# Altium PCB PCB3.PcbDoc
Units mm, origin at the board's own origin, x right, y up, seen from the top; angles counter-clockwise.
Board outline 54 x 25 mm, 2 copper layers (Top Layer, Bottom Layer); 7 components, 28 nets, 102 pads, 36 vias.
Unrouted connection lines stored in the file: 1.
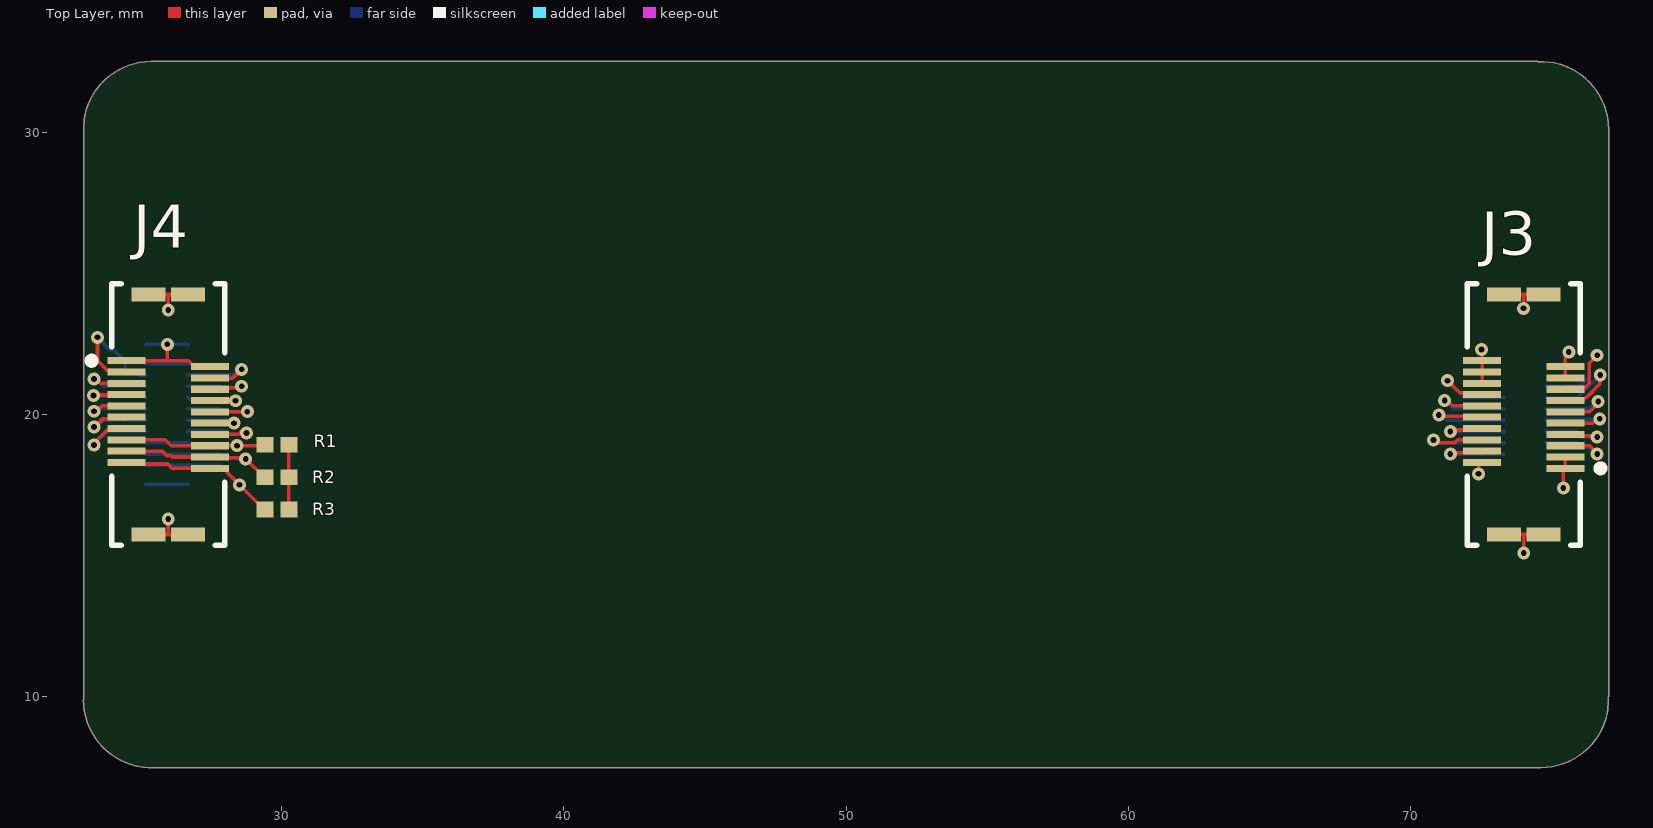
[diagram p0: Top Layer view]
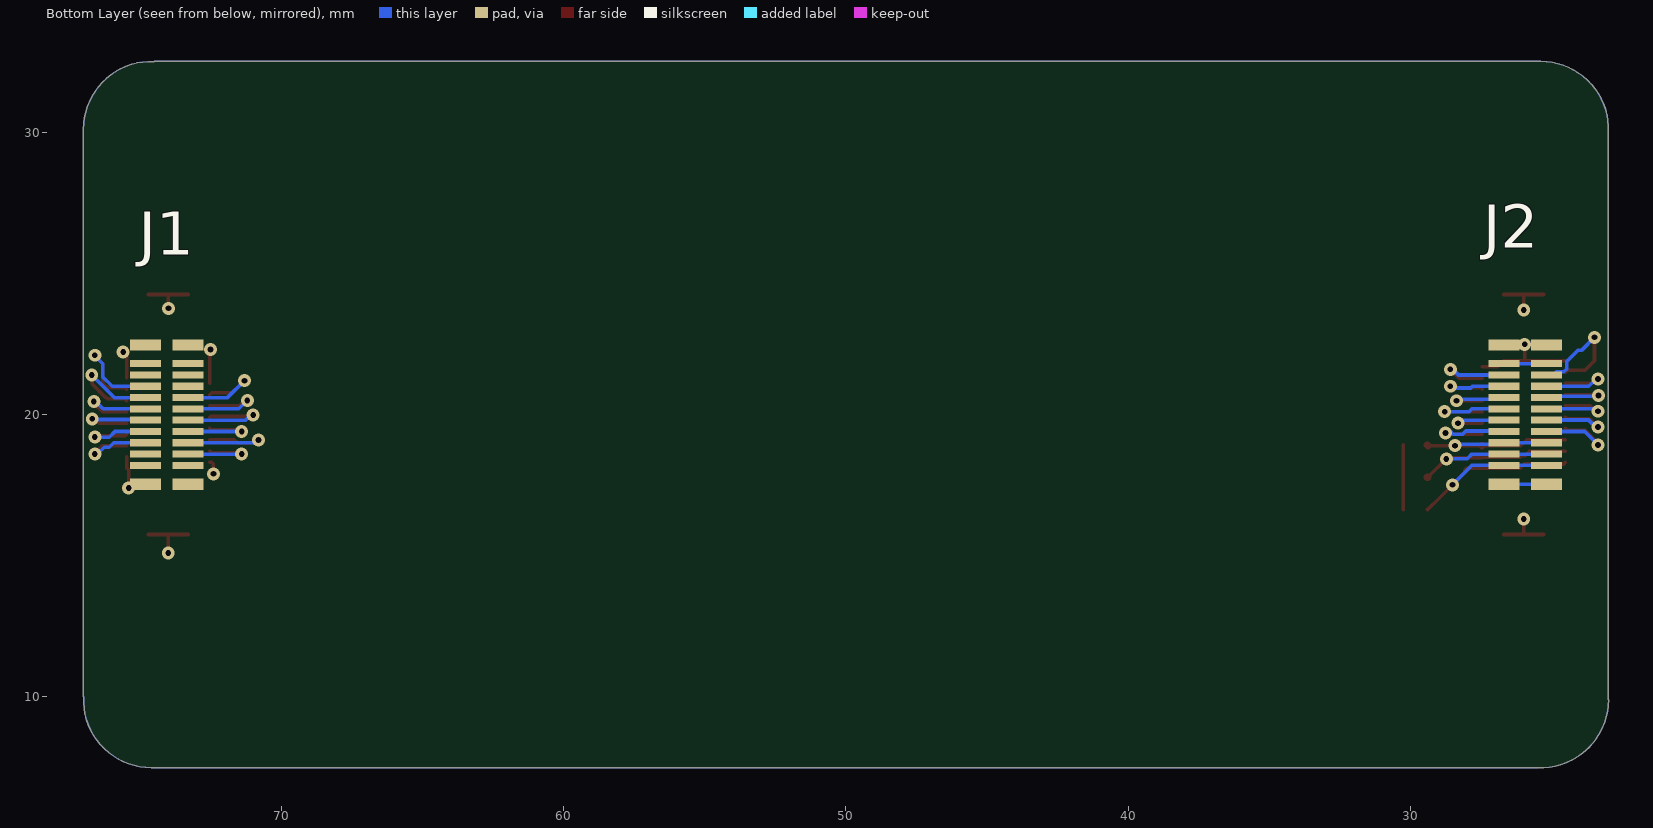
[diagram p1: Bottom Layer view, seen from below]

## Layer stack, top to bottom
Top Solder: solder mask 0.0102, Solder Resist, Dk 3.5
Top Layer: signal copper 0.0356
Dielectric 1: dielectric 0.32, FR-4, Dk 4.8
Bottom Layer: signal copper 0.0356
Bottom Solder: solder mask 0.0102, Solder Resist, Dk 3.5

## Board outline
23,9.902 23,30 cw(c25.4,30.1) 25.4,32.502 74.498,32.502 74.5,32.5 cw(c74.6,30.1) 77.002,30.1 77.002,10.002 77,10 cw(c74.6,9.9) 74.6,7.498 25.502,7.498 25.5,7.5 cw(c25.4,9.9)

## Design rules (kind name [scope] priority, off if disabled: settings)
Clearance [All] p1: gap=0.102 ignorepadtopadclearanceinfootprint=FALSE
PolygonConnect [All] p1: connectstyle=Relief reliefconductorwidth=0.254 reliefentries=4 polygonreliefangle="90 Angle" airgapwidth=0.254
RoutingVias [All] p1: holewidth=0.203 width=0.457 viastyle="Through Hole" minholewidth=0.203 minwidth=0.457 maxholewidth=0.711 maxwidth=1.27
SolderMaskExpansion [All] p1: expansion=0.102 istentingtop=FALSE
Width [All] p1: maxlimit=1.27 minlimit=0.102 preferedwidth=0.127
30 further rules are at their usual default settings.

## Components (designator, comment, footprint, x,y, rotation, side; value= is the part's Value field where it differs from the comment)
J1 "2039550203" 2039550203 74,20 r90 bottom
J2 "2039550203" 2039550203 26,20 r270 bottom
J3 "2039560203" Molex_0_MFG 74,20 r90 top
J4 "2039560203" Molex_0_MFG 26,20 r270 top
R1 "0R" RESC1005X40X25NL05T10 29.845,18.923 r0 top
R2 "0R" RESC1005X40X25NL05T10 29.845,17.78 r0 top
R3 "0R" RESC1005X40X25NL05T10 29.845,16.637 r0 top

## Footprints (in the part's own frame and the unit in brackets; to place one, negate y for a bottom-side part, rotate by r counter-clockwise, add the part's x,y. Pads: shape width x height; smd on the part's side, far side on the other; paste and mask are expansions set on the pad)
2039550203 [mm]
  rect 0.25x1.1 smd mask+0.102: 1(-1.8,0.8) 2(-1.8,-0.7) 3(-1.4,0.8) 4(-1.4,-0.7) 5(-1,0.8) 6(-1,-0.7) 7(-0.6,0.8) 8(-0.6,-0.7) 9(-0.2,0.8) 10(-0.2,-0.7) 11(0.2,0.8) 12(0.2,-0.7) 13(0.6,0.8) 14(0.6,-0.7) 15(1,0.8) 16(1,-0.7) 17(1.4,0.8) 18(1.4,-0.7) 19(1.8,0.8) 20(1.8,-0.7)
  rect 0.4x1.1 smd mask+0.102: 21(-2.465,0.8) 22(-2.465,-0.7) 23(2.465,0.8) 24(2.465,-0.7)
  body extent -2.68,-1 2.68,1, height 2.9
Molex_0_MFG [mm]
  rect 0.25x1.35 smd paste+0 mask+0: 1(-1.905,-1.475) 2(-1.695,1.475) 3(-1.505,-1.475) 4(-1.295,1.475) 5(-1.105,-1.475) 6(-0.895,1.475) 7(-0.705,-1.475) 8(-0.495,1.475) 9(-0.305,-1.475) 10(-0.095,1.475) 11(0.095,-1.475) 12(0.305,1.475) 13(0.495,-1.475) 14(0.705,1.475) 15(0.895,-1.475) 16(1.105,1.475) 17(1.295,-1.475) 18(1.505,1.475) 19(1.695,-1.475) 20(1.905,1.475)
  rect 0.5x1.2 smd paste+0 mask+0: 21(-4.25,0.7) 22(4.25,0.7) 23(-4.25,-0.7) 24(4.25,-0.7)
  silkscreen extent -4.62,-2.84 4.62,2, body extent -4.72,-2.25 4.72,2.25, height 0.25
RESC1005X40X25NL05T10 [mm] "Chip Resistor, 2-Leads, Body 1.00x0.50mm, IPC Medium Density"
  rect 0.6x0.55 smd: 1(-0.425,0) 2(0.425,0)
  body extent -0.53,-0.27 0.53,0.28, height 0.4

## Part data
J3 J4: library part CMP-003-000000-1, "20 Position Connector Plug, Outer Shroud Contacts Surface Mount Gold", Current Rating=0.3A, Digikey Part Number=900-2039560203CT-ND, Manufacturer=Molex, Mouser Part Number=538-203956-0203, Package=0, Temperature="-40°C to +125°C", Temperature Range High=+125°C, Temperature Range Low=-40°C, Voltage Rating=40V, Automotive=No, ComponentLink1Description=Upverter, ComponentLink1URL=https://upverter.com/part/id/0a58283e91808ac4/, ComponentLink2Description=Datasheet, ComponentLink2URL=https://www.molex.com/webdocs/datasheets/pdf/en-us/2039560203_PCB_HEADERS.pdf, Conn Gender=Male, Conn Orientation=Vertical, Contact Material=Gold,Nickel, Datasheet Path=datasheets/Conn_Molex_2039560203_eec.pdf, Digikey Description="CONN PLUG 20POS SMD GOLD", Footprint Url=https://www.molex.com/pdm_docs/sd/2039560203_sd.pdf, Height=4.55mm, helpURL=https://upverter.com/part/id/0a58283e91808ac4/, Is Female=no, Lead Free=Yes, Number Of Contacts=20, Number Of Rows=2, Part Number=2039560203, Pitch=0.4mm, RoHS=TRUE, Symbol Hash=db22f1623fbfed54a22177e49599976dea34d6b12f98f445fc170047d3fb1d12, Verification Version=0.0.0.3
R1 R2 R3: library part CMP-1011-00001-2, Manufacturer="Yageo / Phycomp", Part Number=RC0402JR-070RL

## Via types
v1: diameter 0.457, hole 0.203, Top Layer to Bottom Layer, 36 vias

## Nets (pads, with @x,y where several pads share a name; then routed paths per layer and width w, separated by ;. In a path a pad name is that pad's centre, name@x,y a point inside that pad or via, vN(x,y) a via of type N, cw(c..) or ccw(c..) an arc to the next point about the centre after c; other vN are vias at no path point)
AIN6: J2.8 J4.8 | length 2.6
  Top Layer w0.127: J4.8 27.478,20.492 28.375,20.492 v1(28.378,20.489)
  Bottom Layer w0.127: J2.8 26.757,20.543 28.324,20.543 v1(28.378,20.489)
AIN7: J2.9 J4.9 | length 3.1
  Top Layer w0.127: v1(23.368,20.117) 23.457,20.117 23.653,20.312 24.517,20.312 J4.9
  Bottom Layer w0.127: v1(23.368,20.117) 23.457,20.117 23.541,20.2 J2.9
GND: J1.1 J1.2 J1.3 J1.16 J1.17 J1.18 J1.19 J1.20 J1.21 J1.22 J1.23 J1.24 J2.1 J2.2 J2.14 J2.21 J2.22 J2.23 J2.24 J3.1 J3.2 J3.3 J3.16 J3.17 J3.18 J3.19 J3.20 J3.21 J3.22 J3.23 J3.24 J4.1 J4.2 J4.14 J4.21 J4.22 J4.23 J4.24 | length 23.4
  Top Layer w0.127: J4.1 25.908,21.905 ; J4.24 26,15.75 ; J4.23 26,24.25 ; v1(25.97,22.486) 25.97,21.967 25.908,21.905 ; v1(26,16.3) 26,15.75 ; v1(26,23.7) 26,24.25 ; J4.22 26,15.75 ; J4.21 26,24.25 ; J4.14 28.373,19.295 28.379,19.301 28.496,19.301 28.613,19.418 28.723,19.308 v1@28.764,19.349 ; J4.2 26.925,21.695 26.715,21.905 25.908,21.905 ; v1@28.765,19.349 v1(28.769,19.346) ; v1(72.4,17.9) 72.4,18.243 72.462,18.305 J3.2 ; v1(72.5,22.3) 72.525,22.275 J3.20 J3.18 J3.16 ; J3.21 74,15.75 ; J3.22 74,24.25 ; v1(73.989,23.761) 74,23.772 74,24.25 ; v1(74,15.1) 74,15.75 ; J3.23 74,15.75 ; J3.24 74,24.25 ; v1(75.4,17.4) 75.4,18.033 75.462,18.095 J3.1 J3.3 ; J3.17 J3.19 75.475,22.092 v1(75.595,22.212)
  Bottom Layer w0.127: J2.23 J2.24 ; J2.1 J2.2 ; J2.21 25.221,22.486 v1(25.97,22.486) 26.679,22.486 J2.22 ; J2.14 26.716,19.416 28.055,19.416 28.17,19.301 28.496,19.301 28.613,19.418 28.723,19.308 v1@28.764,19.349 ; v1@28.765,19.349 v1(28.769,19.346)
I2C0_SCL: J1.12 J3.12 | length 3.6
  Top Layer w0.127: v1(71.2,20.5) 71.289,20.5 71.484,20.305 J3.12
  Bottom Layer w0.127: v1(71.2,20.5) 71.5,20.2 J1.12
I2C0_SDA: J1.13 J3.13 | length 4
  Top Layer w0.127: J3.13 75.537,20.557 76.157,20.557 76.205,20.605 76.218,20.605 76.685,21.072 76.685,21.376 v1(76.709,21.4)
  Bottom Layer w0.127: J1.13 75.909,20.6 v1(76.709,21.4)
I2C1_SCL: J2.10 J4.10 | length 3.5
  Top Layer w0.127: J4.10 28.795,20.095 v1(28.8,20.1)
  Bottom Layer w0.127: J2.10 27.834,20.2 27.939,20.095 28.795,20.095 v1(28.8,20.1)
I2C1_SDA: J2.11 J4.11 | length 3.2
  Top Layer w0.127: v1(23.368,19.558) 23.39,19.558 23.675,19.843 24.463,19.843 J4.11
  Bottom Layer w0.127: v1(23.368,19.558) 23.457,19.558 23.705,19.806 25.194,19.806 J2.11
I2S_CLKEXT: J2.3 J4.3 | length 4.4
  Top Layer w0.127: v1(23.495,22.733) 23.495,21.902 23.83,21.567 24.463,21.567 J4.3
  Bottom Layer w0.127: v1(23.495,22.733) 23.958,22.27 24.085,22.27 24.485,21.87 24.485,21.607 24.582,21.51 24.845,21.51 24.955,21.4 J2.3
I2S_SCK: J1.10 J3.10 | length 3.9
  Top Layer w0.127: v1(70.992,19.981) 71.031,19.943 72.487,19.943 J3.10
  Bottom Layer w0.127: v1(70.992,19.981) 71.082,19.981 71.263,19.8 J1.10
I2S_SDI: J1.14 J3.14 | length 3.7
  Top Layer w0.127: v1(71.3,21.2) 71.733,20.767 72.463,20.767 J3.14
  Bottom Layer w0.127: v1(71.3,21.2) 71.9,20.6 J1.14
I2S_SDO: J1.15 J3.15 | length 4.6
  Top Layer w0.127: J3.15 75.537,20.957 76.17,20.957 76.315,21.102 76.315,21.815 v1(76.6,22.1)
  Bottom Layer w0.127: J1.15 75.986,21 76.315,21.33 76.315,21.792 76.6,22.077 v1(76.6,22.1)
I2S_WS: J1.11 J3.11 | length 3.3
  Top Layer w0.127: J3.11 76.341,20.095 76.635,20.39 v1(76.635,20.465)
  Bottom Layer w0.127: J1.11 76.307,20.2 76.572,20.465 v1(76.635,20.465)
PDOWN: J2.12 J4.12 | length 2.5
  Top Layer w0.127: J4.12 v1(28.333,19.695)
  Bottom Layer w0.127: J2.12 28.158,19.8 28.201,19.757 28.271,19.757 v1(28.333,19.695)
QSPI0_MISO: J1.6 J3.6 | length 4.3
  Top Layer w0.127: v1(70.8,19.1) 70.889,19.1 70.983,19.006 71.563,19.006 71.662,19.105 J3.6
  Bottom Layer w0.127: v1(70.8,19.1) 70.889,19.1 70.989,19 J1.6
QSPI0_MOSI: J1.5 J3.5 | length 3.2
  Top Layer w0.127: J3.5 75.477,18.898 76.341,18.898 76.6,18.638 v1(76.6,18.6)
  Bottom Layer w0.127: J1.5 75.928,19 76.085,18.843 76.268,18.843 76.511,18.6 v1(76.6,18.6)
QSPI0_SCK: J1.7 J3.7 | length 3
  Top Layer w0.127: J3.7 75.523,19.248 76.552,19.248 v1(76.6,19.2)
  Bottom Layer w0.127: J1.7 75.886,19.4 76.086,19.2 v1(76.6,19.2)
QSPI0_SDIO2: J1.8 J3.8 | length 3.1
  Top Layer w0.127: v1(71.4,19.4) 71.453,19.453 72.472,19.453 J3.8
  Bottom Layer w0.127: v1(71.4,19.4) J1.8
QSPI0_SDIO3: J1.9 J3.9 | length 3.2
  Top Layer w0.127: J3.9 76.448,19.695 76.601,19.848 v1(76.69,19.848)
  Bottom Layer w0.127: J1.9 74.824,19.824 76.666,19.824 v1(76.69,19.848)
QSPI0_SS0: J1.4 J3.4 | length 3.1
  Top Layer w0.127: v1(71.4,18.6) 71.452,18.653 72.472,18.653 J3.4
  Bottom Layer w0.127: v1(71.4,18.6) J1.4
SQWOUT: J2.13 J4.13 | length 3.5
  Top Layer w0.127: v1(23.368,18.923) 23.368,18.981 23.83,19.443 24.463,19.443 J4.13
  Bottom Layer w0.127: v1(23.368,18.923) 23.845,19.4 J2.13
UART0_CTS: J2.5 J4.5 | length 3.2
  Top Layer w0.127: v1(23.368,21.26) 23.457,21.26 23.612,21.105 J4.5
  Bottom Layer w0.127: v1(23.368,21.26) 23.441,21.26 23.701,21 J2.5
UART0_RTS: J2.4 J4.4 | length 3.2
  Top Layer w0.127: J4.4 27.48,21.29 28.29,21.29 v1(28.6,21.6)
  Bottom Layer w0.127: J2.4 28.311,21.4 28.511,21.6 v1(28.6,21.6)
UART0_RX: J2.7 J4.7 | length 3.1
  Top Layer w0.127: v1(23.351,20.677) 23.365,20.691 24.511,20.691 J4.7
  Bottom Layer w0.127: v1(23.351,20.677) 23.378,20.65 25.15,20.65 J2.7
UART0_TX: J2.6 J4.6 | length 3.1
  Top Layer w0.127: J4.6 27.528,20.948 28.547,20.948 v1(28.601,21.001)
  Bottom Layer w0.127: J2.6 27.818,21 27.88,20.938 28.537,20.938 v1(28.601,21.001)
VCC: R1.2 R2.2 R3.2 | length 2.3
  Top Layer w0.127: R3.2 R2.2 R1.2
VCC_1: J2.15 J2.16 J4.15 J4.16 R1.1 | length 8.3
  Top Layer w0.127: J4.15 25.894,19.105 26.104,18.895 J4.16 ; J4.16@27.477,18.897 v1(28.436,18.897) R1.1@29.394,18.897
  Top Layer w0.254: J4.16 J4.16@27.477,18.897 ; R1.1@29.394,18.897 R1.1
  Bottom Layer w0.127: J2.15 J2.16 26.751,18.949 28.384,18.949 v1(28.436,18.897)
VCC_2: J2.17 J2.18 J4.17 J4.18 R2.1 | length 8.9
  Top Layer w0.127: J4.17 25.791,18.705 25.957,18.539 26.104,18.539 26.149,18.495 J4.18 27.508,18.462 28.708,18.462 v1(28.741,18.429) ; v1@28.731,18.444 R2.1@29.395,17.78
  Top Layer w0.254: R2.1@29.395,17.78 R2.1
  Bottom Layer w0.127: J2.17 27.833,18.6 28.004,18.429 v1(28.741,18.429)
VCC_3: J2.19 J2.20 J4.19 J4.20 R3.1 | length 9.2
  Top Layer w0.127: J4.19 24.583,18.247 25.983,18.247 26.136,18.095 J4.20 28.025,18.095 28.086,18.033 28.086,17.946 28.956,17.076 29.395,16.637 R3.1
  Bottom Layer w0.127: J2.19 J2.20 27.832,18.2 v1(28.521,17.511)

## Polygon pours and split planes (outlines as drawn)
VCC on Top Layer "NONET_L01_P000" (solid, shelved, pour order 0): 23,9.902 23,30 cw(c25.4,30.1) 25.4,32.502 74.498,32.502 74.5,32.5 cw(c74.6,30.1) 77.002,30.1 77.002,10.002 77,10 cw(c74.6,9.9) 74.6,7.498 25.502,7.498 25.5,7.5 cw(c25.4,9.9)
GND on Bottom Layer "NONET_L02_P001" (solid, shelved, pour order 1): 23,9.902 23,30 cw(c25.4,30.1) 25.4,32.502 74.498,32.502 74.5,32.5 cw(c74.6,30.1) 77.002,30.1 77.002,10.002 77,10 cw(c74.6,9.9) 74.6,7.498 25.502,7.498 25.5,7.5 cw(c25.4,9.9)

## Silkscreen, mask and mechanical layers (free items; w line width, h text height)
Mechanical 1:
  lines w0.025: 22.998,9.9 ccw(c25.4,9.9) 25.5,7.5 ; 23,9.902 23,30 cw(c25.4,30.1) 25.4,32.502 74.498,32.502 ; 25.502,7.498 74.6,7.498 ccw(c74.6,9.9) 77,10 ; 74.5,32.5 cw(c74.6,30.1) 77.002,30.1 77.002,10.002